# Altium PCB WiFi.PcbDoc
Units mil, origin at the board's own origin, x right, y up, seen from the top; angles counter-clockwise.
Board outline 800 x 800 mil, 2 copper layers (Top Layer, Bottom Layer); 5 components, 4 nets, 27 pads, 1 vias.
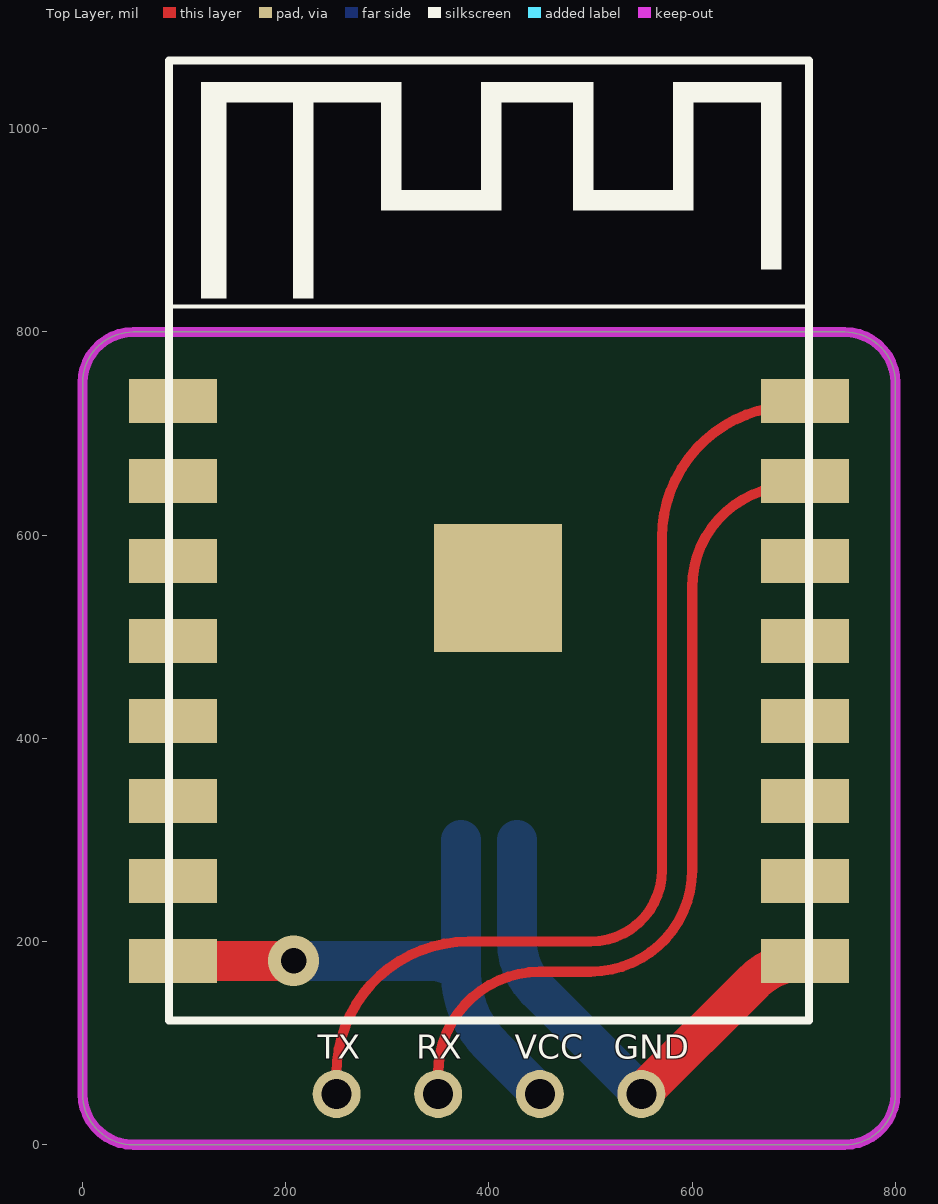
[diagram p0: Top Layer view]
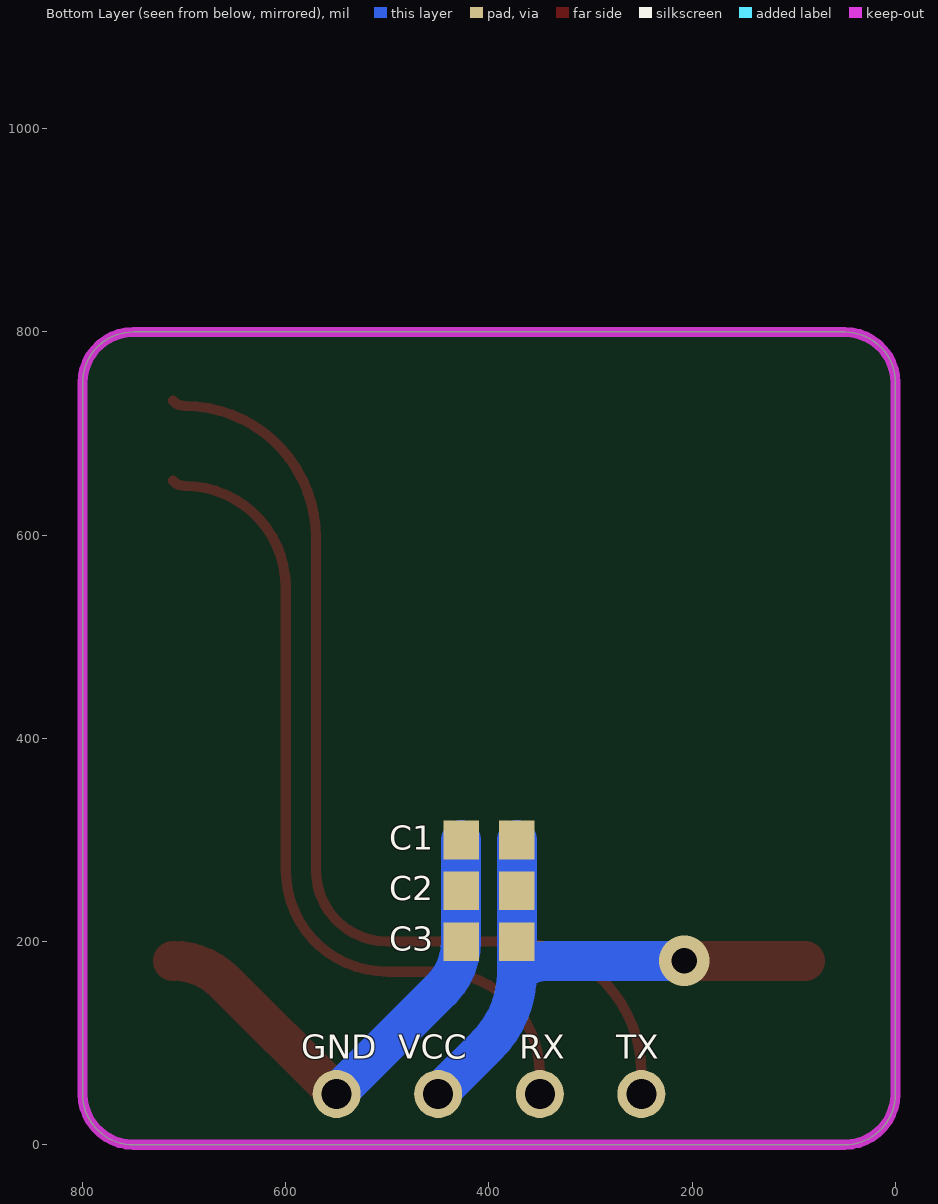
[diagram p1: Bottom Layer view, seen from below]
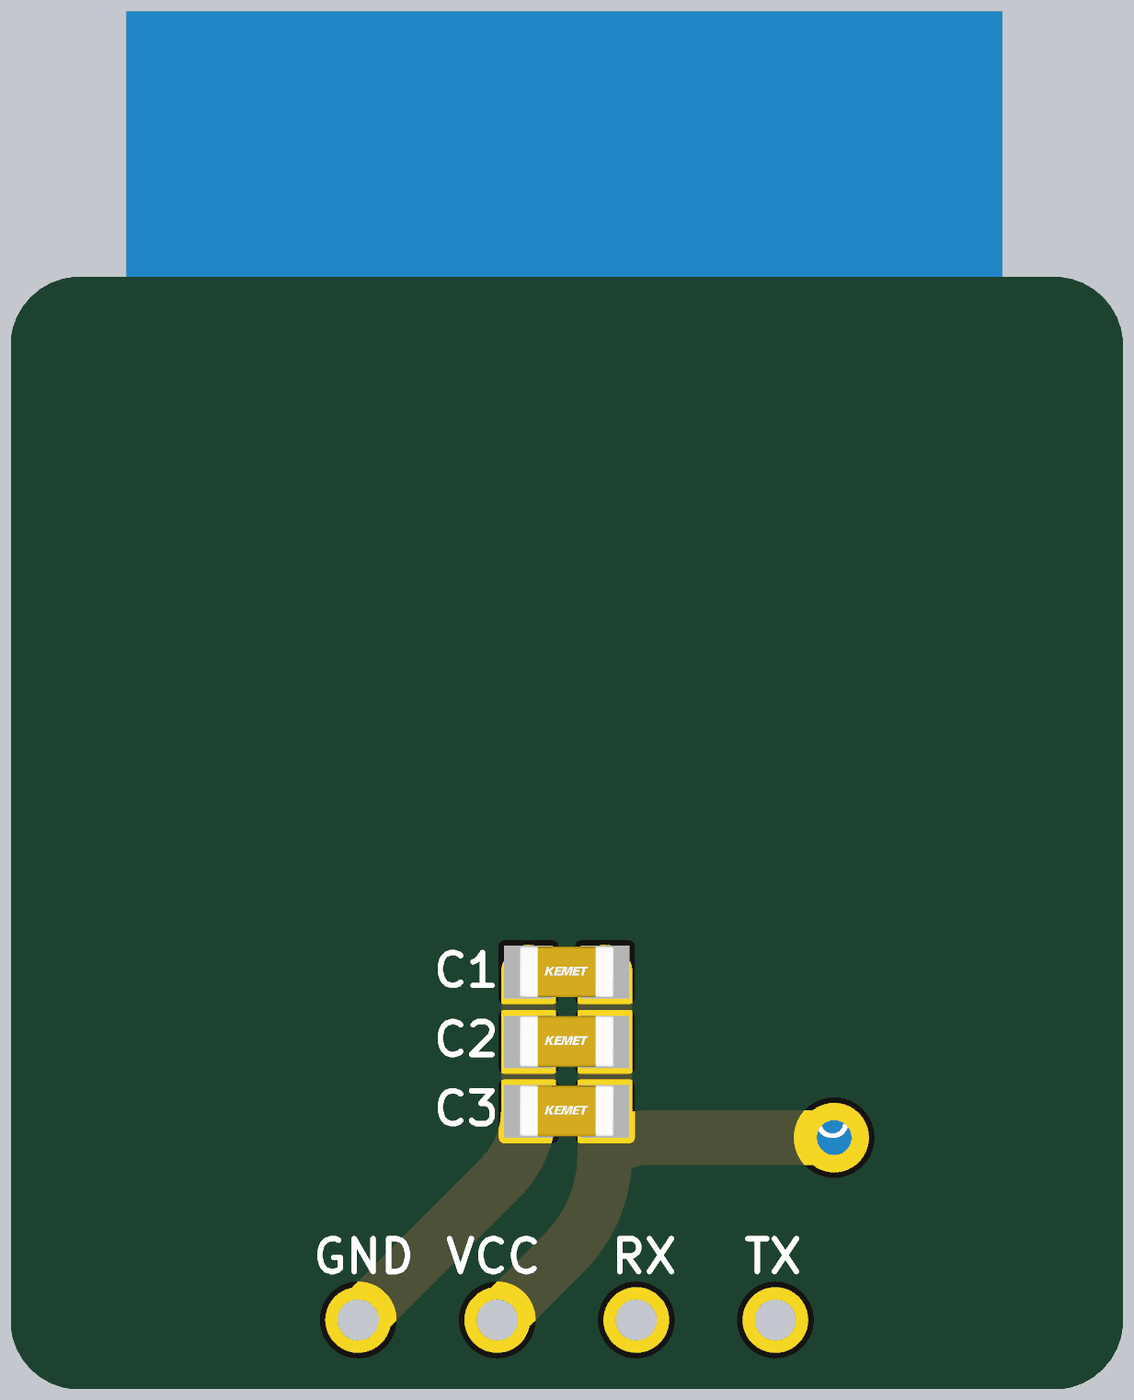
[diagram p2: 3D render of the assembled board from below, using the file's embedded part models]

## Layer stack, top to bottom
Top Solder: solder mask 0.4, Solder Resist, Dk 3.5
Top Layer: signal copper 1.4
Dielectric 1: dielectric 12.6, FR-4, Dk 4.8
Bottom Layer: signal copper 1.4
Bottom Solder: solder mask 0.4, Solder Resist, Dk 3.5

## Board outline
50,0 cw(c50,50) 0,50 0,750 cw(c50,750) 50,800 750,800 cw(c750,750) 800,750 800,50 cw(c750,50) 750,0

## Design rules (kind name [scope] priority, off if disabled: settings)
Clearance [All] p1: gap=5 ignorepadtopadclearanceinfootprint=FALSE except(0: Arc-Hole Track-Hole SMDPad-Hole THPad-Hole Via-Hole Fill-Hole Poly-Hole Region-Hole Text-Hole)
MinimumSolderMaskSliver [All] p1: minsoldermaskwidth=3
PolygonConnect [All] p1: connectstyle=Relief reliefconductorwidth=10 reliefentries=4 polygonreliefangle="90 Angle" airgapwidth=10
RoutingVias [All] p1: holewidth=28 width=50 viastyle="Through Hole" minholewidth=28 minwidth=50 maxholewidth=28 maxwidth=50
SilkToSilkClearance [All] p1: silktosilkclearance=4
SilkToSolderMaskClearance [IsPad] p1: minsilkscreentomaskgap=0 clearancetoexposedcopper=TRUE
SolderMaskExpansion [All] p1: expansion=4
Width [All] p1: maxlimit=39.37 minlimit=10 preferedwidth=19.68
27 further rules are at their usual default settings.

## Components (designator, comment, footprint, x,y, rotation, side; value= is the part's Value field where it differs from the comment)
C1 "10uF" C0603 400,300 r180 bottom
C2 "10nF" C0603 400,250 r180 bottom
C3 "100nF" C0603 400,200 r180 bottom
P1 "m4Pin" "4x1 header" 550,50 r180 top
W1 "ESP8266" ESP-12S 400,456.69 r0 top

## Footprints (in the part's own frame and the unit in brackets; to place one, negate y for a bottom-side part, rotate by r counter-clockwise, add the part's x,y. Pads: shape width x height; smd on the part's side, far side on the other; paste and mask are expansions set on the pad)
"4x1 header" [mm]
  round 1.2 hole 0.75: 1(0,0) 2(2.54,0) 3(5.08,0) 4(7.62,0)
C0603 [mil]
  rect 35x38 smd: 1(-27.5,0) 2(27.5,0)
  body extent -34,-18 34,19, height 33
ESP-12S [mm]
  rect 2.2x1.1 smd: 1(-7.9,7) 2(-7.9,5) 3(-7.9,3) 4(-7.9,1) 5(-7.9,-1) 6(-7.9,-3) 7(-7.9,-5) 8(-7.9,-7) 9(7.9,-7) 10(7.9,-5) 11(7.9,-3) 12(7.9,-1) 13(7.9,1) 14(7.9,3) 15(7.9,5) 16(7.9,7)
  rect 3.2x3.2 smd: 17(0.22,2.321)
  silkscreen extent -8,-8.5 8,15.5, body extent -7.96,-8.43 8.04,13.57, height 3.5

## Part data
C1 C2 C3: library part C0603, "陶瓷电容"
P1: "1x4pin 1.27mm"

## Via types
v1: diameter 50, hole 25, Top Layer to Bottom Layer, 1 vias

## Nets (pads, with @x,y where several pads share a name; then routed paths per layer and width w, separated by ;. In a path a pad name is that pad's centre, name@x,y a point inside that pad or via, vN(x,y) a via of type N, cw(c..) or ccw(c..) an arc to the next point about the centre after c; other vN are vias at no path point)
GND: C1.1 C2.1 C3.1 P1.1 W1.9 | length 510.1
  Top Layer w39.37: P1.1 659.94,159.94 cw(c711.02,108.87) W1.9
  Bottom Layer w39.37: C1.1 C2.1 C3.1 ccw(c493.89,200) 446.95,153.05 P1.1
RX: P1.3 W1.15 | length 832.3
  Top Layer w10: P1.3 350,70.31 cw(c450,70.31) 450,170.31 500,170.31 ccw(c500,270.31) 600,270.31 600,548.54 cw(c700,548.54) 700,648.54 ccw(c700,663.09) 710.28,652.8 W1.15
TX: P1.4 W1.16 | length 998.3
  Top Layer w10: P1.4 250,70.31 cw(c379.68,70.31) 379.68,200 500,200 ccw(c500,270.31) 570.32,270.31 570.32,597.6 cw(c700,597.6) 700,727.28 ccw(c700,741.83) 710.28,731.54 W1.16
VDD: C1.2 C2.2 C3.2 P1.2 W1.8 | length 564.6
  Top Layer w39.37: W1.8 v1(207.74,181.1)
  Bottom Layer w39.37: v1(207.74,181.1) 343.09,181.1 cw(c343.09,139.51) 372.5,168.92 ; C1.2 C2.2 C3.2 372.5,168.92 ; P1.2 401.79,98.21 cw(c472.5,168.92) 372.5,168.92
pads on no net: W1.1 W1.2 W1.3 W1.4 W1.5 W1.6 W1.7 W1.10 W1.11 W1.12 W1.13 W1.14 W1.17

## Keep-outs
Keep-Out Layer:
  the board outline again, w10

## Silkscreen, mask and mechanical layers (free items; w line width, h text height)
Top Overlay:
  text "TX" at 231.3,84.65 h23.62
  text "RX" at 328.41,84.65 h23.62
  text "VCC" at 425.52,84.65 h23.62
  text "GND" at 522.64,84.65 h23.62
Bottom Overlay:
  text "TX" at 274.61,84.65 h23.62
  text "RX" at 370.08,84.65 h23.62
  text "VCC" at 489.17,84.65 h23.62
  text "GND" at 584.65,84.65 h23.62